# Allegro board BD9E151NUX-E2EVK-101_BRD_REV00_2014-08-20.brd
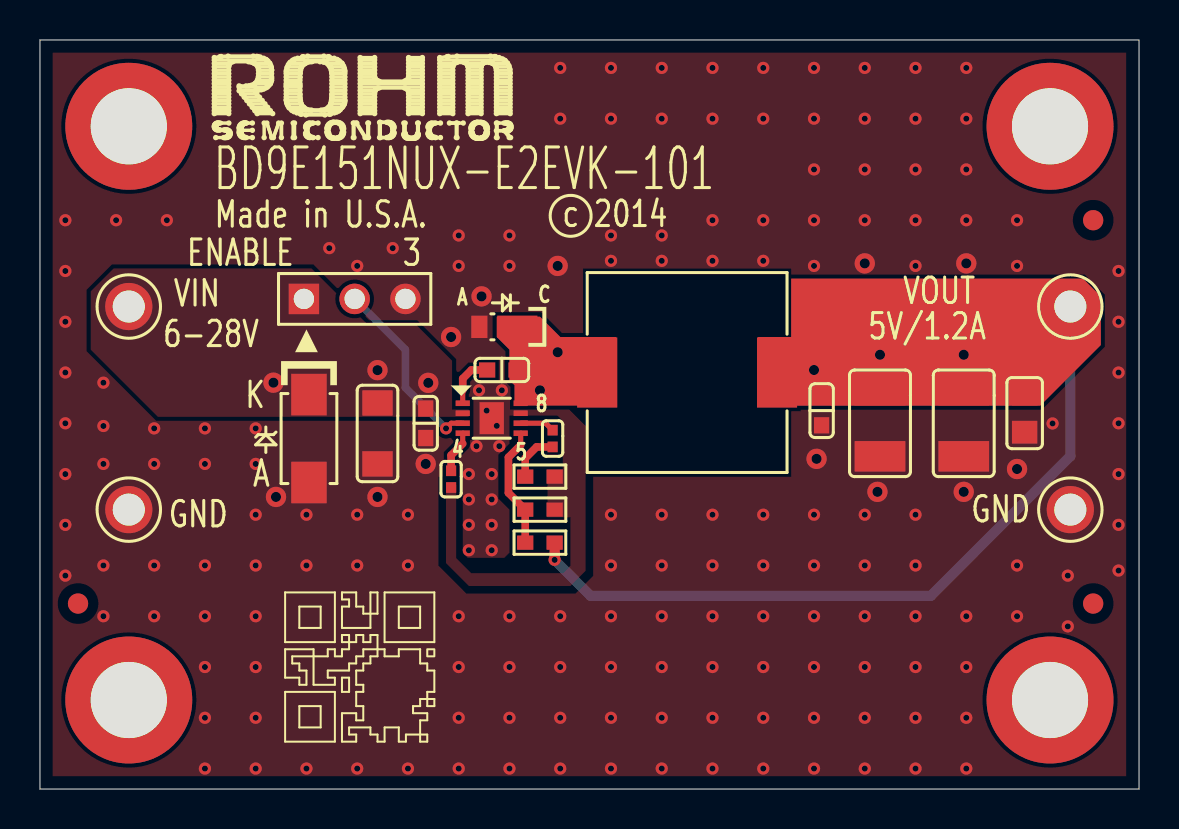
[diagram p0: board, top side]
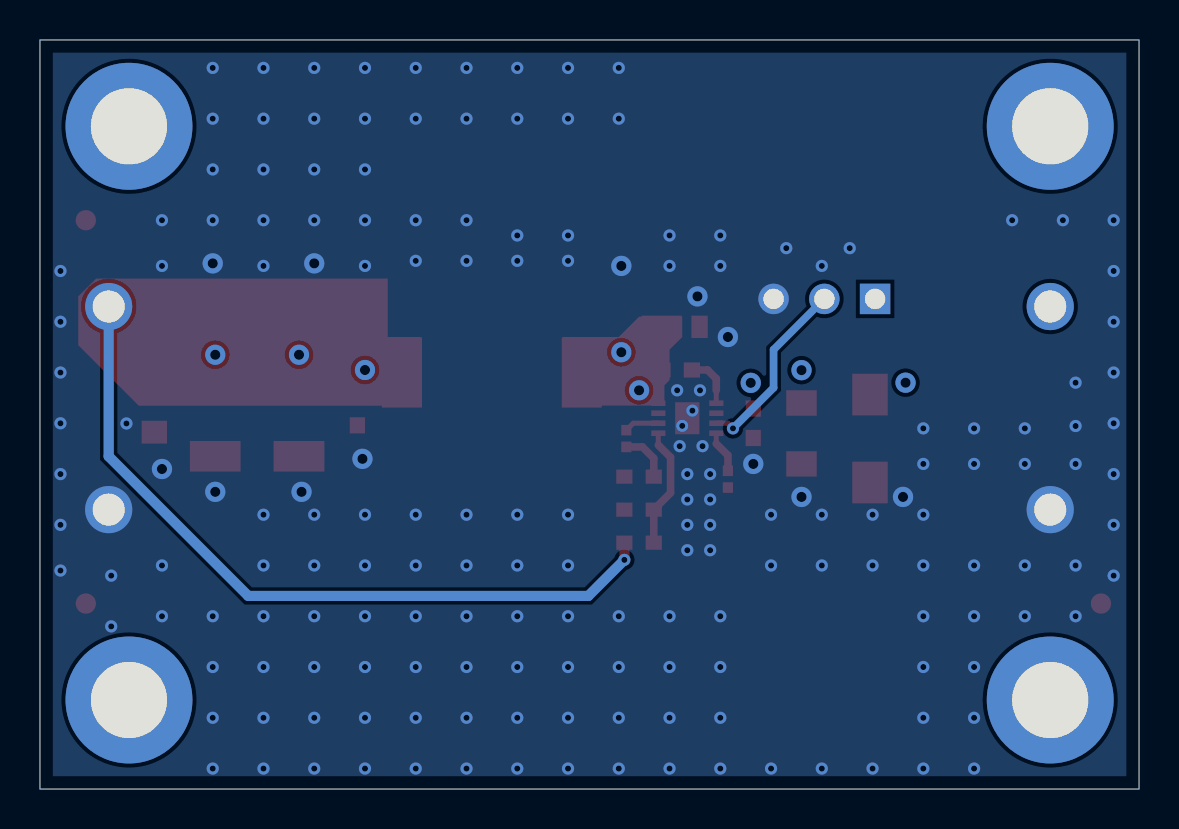
[diagram p1: board, bottom side, seen from below]

Outline 55 x 37.47 mm; copper layers: TOP, BOTTOM. Coordinates in mm from the lower left corner of the outline.
Outline path: 0,37.47 55,37.47 55,0 0,0 0,37.47

## Placement (name value [footprint] x y rotation side)
C1  0.1uF  [C0603]  23.11 20.96 180 top
C2  22uF  [C1210]  46.23 18.3 270 top
C3  22uF  [C1210]  42.04 18.3 270 top
C4  TBD  [C0603]  39.12 18.93 90 top
C5  TBD  [C0805]  49.28 18.8 270 top
C6  10uF  [C1206]  16.89 17.79 270 top
C7  TBD  [C0603]  19.3 18.3 90 top
C8  10000pF  [C0402]  25.65 17.53 270 top
C9  0.047uF  [C0402]  20.57 15.5 270 top
D1  RSX101VA-30TR  [TUMD2]  23.24 23.12 270 top
D2  SMAJ26A  [DO-214AC]  13.46 17.53 270 top
J1  68000-103HLF  [HDR_THVT_1X3_100]  13.21 24.52 0 top
L1  15uH  [SMT_10MX10M]  32.38 20.84 90 top
NOREF  -  [unnamed]  50.55 4.45 0 top
NOREF#2  -  [#2]  0 0 0 top
NOREF#3  -  [unnamed]  50.55 33.15 0 top
NOREF#4  -  [#2]  0 0 0 top
NOREF#5  -  [unnamed#3]  52.7 9.28 0 top
NOREF#6  -  [#2]  55 0 0 top
NOREF#7  -  [#2]  55 0 90 top
NOREF#8  -  [#2]  -18.29 -37.33 0 top
NOREF#9  -  [unnamed]  4.45 33.15 0 top
NOREF#10  -  [#2]  -63.5 -124.58 0 top
NOREF#11  -  [#2]  0 37.47 0 top
NOREF#12  -  [unnamed]  4.45 4.45 0 top
NOREF#13  -  [unnamed#3]  52.7 28.46 0 top
NOREF#14  -  [#2]  0 37.47 0 top
NOREF#15  -  [unnamed#3]  1.91 9.28 0 top
R1  12K  [R0603]  25.02 12.33 0 top
R2  3K  [R0603]  25.02 13.98 180 top
R3  2.7K  [R0603]  25.02 15.63 180 top
TP1  TP_TH_63MIL_RED  [TP_TH]  4.45 24.14 0 top
TP2  TP_TH_63MIL_BLK  [TP_TH]  4.45 13.98 0 top
TP3  TP_TH_63MIL_RED  [TP_TH]  51.56 24.14 0 top
TP4  TP_TH_63MIL_BLK  [TP_TH]  51.56 13.98 0 top
U1  BD9E151NUX  [VSON008X2030]  22.61 18.55 270 top

## Library data of the parts
C1 = CAP_HOZ
C2-C9 = CAP_VER
D1 D2 = DIODE SCHOTTKY_VER
J1 = CONN PCB 3x1_2.100"
L1 = IND_HOZ
R1-R3 = R_VER
TP1 TP3 = TP_TH_63MIL_RED
TP2 TP4 = TP_TH_63MIL_BLK
U1 = IC_BD9E151NUX

## Footprints (pads in the part's own frame, mm; a bottom-side part is the same pattern mirrored in y, then rotated)
C0402
  rect 0.533x0.508 smd: 1(-0.419,0) 2(0.419,0)
C0603
  rect 0.813x0.762 smd: 1(0.737,0) 2(-0.737,0)
C0805
  rect 1.143x1.27 smd: 1(-0.953,0) 2(0.953,0)
C1206
  rect 1.27x1.524 smd: 1(-1.524,0) 2(1.524,0)
C1210
  rect 1.524x2.54 smd: 1(-1.651,0) 2(1.651,0)
DO-214AC
  rect 2.083x1.778 smd: 1(-2.2,0) 2(2.2,0)
HDR_THVT_1X3_100
  rect 1.524x1.524 hole 1.016: 1(0,0)
  round 1.524 hole 1.016: 2(2.54,0) 3(5.08,0)
R0603
  rect 0.813x0.711 smd: 1(0.737,0) 2(-0.737,0)
SMT_10MX10M
  rect 3.505x2.007 smd: 1(0,4.5) 2(0,-4.5)
TP_TH
  round 2.362 hole 1.6: 1(0,0)
TUMD2
  rect 1.118x2.007 smd: 1(0,0.65)
  rect 1.118x0.813 smd: 2(0,-1.25)
unnamed
  round 6.35 hole 3.81: (0,0)
unnamed#3
  round 1.016 smd: 1(0,0)
VSON008X2030
  rect 0.279x0.711 smd: 1(-0.75,-1.45) 2(-0.25,-1.45) 3(0.25,-1.45) 4(0.75,-1.45) 5(0.75,1.45) 6(0.25,1.45) 7(-0.25,1.45) 8(-0.75,1.45)
  rect 1.6x1.219 smd: 9(0,0)

## Nets
GND: C2.2 C3.2 C4.2 C5.2 C6.2 C7.2 C9.2 D1.2(A) D2.2(A) J1.3 R2.2 R3.2 TP2.1 TP4.1 U1.7(GND) U1.9(EPAD)
VIN: C6.1 C7.1 D2.1(C) J1.1 TP1.1 U1.2(VIN)
BST: C1.1 U1.1(BST)
EN: J1.2 U1.3(EN)
FB: R1.2 R2.1 U1.5(FB)
SS: C9.1 U1.4(SS)
SW: C1.2 D1.1(C) L1.1 U1.8(LX)
VC: C8.1 U1.6(VC)
VC_R: C8.2 R3.1
VOUT: C2.1 C3.1 C4.1 C5.1 L1.2 R1.1 TP3.1

Pads without a net: NOREF#5 1; NOREF#13 1; NOREF#15 1

## Via types
v1: diameter 1.016, hole 0.508, TOP to BOTTOM, 20 vias
v2: diameter 0.61, hole 0.305, TOP to BOTTOM, 174 vias

## Routing (per net, layer and track width the routed paths; a pad name or vN(x,y) marks a point on that pad's centre or on a via; arc(x,y) is an arc through that point)
GND:
  vias: v1(11.81,14.61) v1(16.89,14.61) v1(19.3,16.26) v1(20.57,22.61) v1(22.1,24.65) v1(25.91,26.17) v1(38.86,16.52) v1(41.27,26.3) v1(41.91,14.87) v1(46.23,14.87) v1(46.35,26.3) v1(48.9,16.01) v2(1.27,28.46) v2(1.27,25.92) v2(1.27,23.38) v2(1.27,20.84) v2(1.27,18.3) v2(1.27,15.76) v2(1.27,13.22) v2(1.27,10.68) v2(3.17,20.33) v2(3.17,18.16) v2(3.17,16.26) v2(3.17,11.18) v2(3.17,8.64) v2(3.81,28.46) v2(5.71,18.04) v2(5.71,16.26) v2(5.71,11.18) v2(5.71,8.64) v2(6.35,28.46) v2(8.26,18.04) v2(8.26,16.26) v2(8.26,11.18) v2(8.26,8.64) v2(8.26,6.1) v2(8.26,3.56) v2(8.26,1.02) v2(10.79,18.04) v2(10.79,16.26) v2(10.79,13.72) v2(10.79,11.18) v2(10.79,8.64) v2(10.79,6.1) v2(10.79,3.56) v2(10.79,1.02) v2(13.34,13.72) v2(13.34,11.18) v2(13.34,1.02) v2(14.48,27.06) v2(15.88,26.17) v2(15.88,13.72) v2(15.88,11.18) v2(15.88,1.02) v2(17.65,27.06) v2(18.41,13.72) v2(18.41,11.18) v2(18.41,1.02) v2(20.95,27.69) v2(20.95,26.17) v2(20.95,8.64) v2(20.95,6.1) v2(20.95,3.56) v2(20.95,1.02) v2(21.46,15.76) v2(21.46,14.49) v2(21.46,13.22) v2(21.46,11.95) v2(21.84,17.15) v2(21.97,19.95) v2(22.35,18.93) v2(22.61,15.76) v2(22.61,14.49) v2(22.61,13.22) v2(22.61,11.95) v2(22.86,18.17) v2(22.99,17.15) v2(23.11,19.95) v2(23.5,27.69) v2(23.5,26.17) v2(23.5,8.64) v2(23.5,6.1) v2(23.5,3.56) v2(23.5,1.02) v2(26.04,36.08) v2(26.04,33.54) v2(26.04,8.64) v2(26.04,6.1) v2(26.04,3.56) v2(26.04,1.02) v2(28.57,36.08) v2(28.57,33.54) v2(28.57,27.69) v2(28.57,26.42) v2(28.57,13.72) v2(28.57,11.18) v2(28.57,8.64) v2(28.57,6.1) v2(28.57,3.56) v2(28.57,1.02) v2(31.11,36.08) v2(31.11,33.54) v2(31.11,27.69) v2(31.11,26.42) v2(31.11,13.72) v2(31.11,11.18) v2(31.11,8.64) v2(31.11,6.1) v2(31.11,3.56) v2(31.11,1.02) v2(33.66,36.08) v2(33.66,33.54) v2(33.66,28.46) v2(33.66,26.42) v2(33.66,13.72) v2(33.66,11.18) v2(33.66,8.64) v2(33.66,6.1) v2(33.66,3.56) v2(33.66,1.02) v2(36.2,36.08) v2(36.2,33.54) v2(36.2,28.46) v2(36.2,26.42) v2(36.2,13.72) v2(36.2,11.18) v2(36.2,8.64) v2(36.2,6.1) v2(36.2,3.56) v2(36.2,1.02) v2(38.73,36.08) v2(38.73,33.54) v2(38.73,31) v2(38.73,28.46) v2(38.73,26.17) v2(38.73,13.72) v2(38.73,11.18) v2(38.73,8.64) v2(38.73,6.1) v2(38.73,3.56) v2(38.73,1.02) v2(41.27,36.08) v2(41.27,33.54) v2(41.27,31) v2(41.27,28.46) v2(41.27,13.72) v2(41.27,11.18) v2(41.27,8.64) v2(41.27,6.1) v2(41.27,3.56) v2(41.27,1.02) v2(43.81,36.08) v2(43.81,33.54) v2(43.81,31) v2(43.81,28.46) v2(43.81,26.17) v2(43.81,13.72) v2(43.81,11.18) v2(43.81,8.64) v2(43.81,6.1) v2(43.81,3.56) v2(43.81,1.02) v2(46.35,36.08) v2(46.35,33.54) v2(46.35,31) v2(46.35,28.46) v2(46.35,8.64) v2(46.35,6.1) v2(46.35,3.56) v2(46.35,1.02) v2(48.9,28.46) v2(48.9,26.17) v2(48.9,11.18) v2(48.9,8.64) v2(50.67,18.29) v2(51.44,10.68) v2(51.44,8.14) v2(53.98,25.92) v2(53.98,23.38) v2(53.98,20.84) v2(53.98,18.3) v2(53.98,15.76) v2(53.98,13.22) v2(53.98,10.93)
VIN:
  vias: v1(11.68,20.33) v1(16.89,20.95) v1(19.43,20.32)
BST: length 2.6
  TOP w0.254: U1.1 21.16,19.95
  TOP w0.381: 21.16,19.95 21.16,20.53 21.59,20.96 C1.1
EN: length 9.3
  TOP w0.254: U1.3 20.58,18.3 v2(20.32,18.04)
  BOTTOM w0.381: v2(20.32,18.04) 18.29,20.07 18.29,21.98 J1.2
FB: length 6.1
  TOP w0.254: 24.06,17.21 U1.5
  TOP w0.381: 24.06,17.21 23.44,16.59 23.44,14.82 R2.1 R1.2
SS: length 2.1
  TOP w0.254: U1.4 21.16,17.28
  TOP w0.381: 21.16,17.28 20.57,16.7 C9.1
SW:
  vias: v1(25.02,19.95) v1(25.91,21.85)
VC: length 1.7
  TOP w0.254: U1.6 25.31,18.3 C8.1
VC_R: length 2.5
  TOP w0.381: R3.1 24.28,16.54 24.85,17.11 C8.2
VOUT: length 37.8
  TOP w0.508: R1.1 v2(25.76,11.46)
  BOTTOM w0.508: v2(25.76,11.46) 27.56,9.66 44.58,9.66 51.56,16.64 TP3.1
  vias: v1(38.73,20.96) v1(42.04,21.72) v1(46.23,21.72)

## Copper pours and planes (outline as drawn; the poured copper is in the pictures)
GND on TOP: 0.64,0.64 0.64,36.84 54.36,36.84 54.36,0.64 ; 1 cut-out
GND on BOTTOM: 0.64,36.84 0.64,0.64 54.36,0.64 54.36,36.84
VIN on TOP: 21.46,18.63 5.89,18.63 2.54,21.98 2.54,24.9 3.68,26.04 13.59,26.04 16.38,23.25 18.8,23.25 20.62,21.42 20.62,18.98 21.46,18.98
SW on TOP (solid shape): 26.04,22.61 28.83,22.61 28.83,19.18 23.75,19.18 23.75,20.2 23.5,20.45 23.5,21.98 22.86,22.61 22.86,23.63 25.02,23.63
VOUT on TOP (solid shape): 53.09,24.65 53.09,22.21 50.06,19.18 35.94,19.18 35.94,22.61 37.59,22.61 37.59,25.53 52.2,25.53

## Text on the board
Ref Des/Silkscreen Top: 6-28V | GND | VIN | ENABLE | Made in U.S.A. | c 2014 | 5V/1.2A | VOUT | BD9E151NUX-E2EVK-101
User.17: 14. Rounding is allowed on 90 degree corners with the size of | 12. Inside corners should be rounded-off | 13. Changes to board geometries and apertures are not | 10. Bow and Twist | 11. Inspection | standard routing bit. | allowed unless they are approved by customer. | 4. Drilling | 5. Finish | 9. Packaging | 8. Cleanliness | 7. Electrical Test | 3. Soldermask | photoimageable soldermask, 003 max. thickness. | Soldermask over bare copper. | Soldermask is allowed in via holes. | Bow and twist to be .007 IN/IN or .090 max according to IPC-A-600D. | NOTES: | 2. Material | 6. Silkscreen | to conduct a thorough review of the artwork and media for | writing (in advance of manufacturing) of any changes, revisions,or | 1. Specifications. | as meaxured by the omega meter 600SMD. | A. All hole diameters are finished sizes. | B. All hole to be +/- .003 from true position unless otherwise specified. | C. All hole diameters to be +/- .003 unless otherwise specified. | D. An NC drill file has been supplied - see drill table. | A. Plate thru with copper .0010 min to .002 max. thickness drill size | dimension apply after plating. | B. Use gold immersion over nickel. | C. Finished boards shall not have nicks, | scratches, voids, exposed copper, poor plating, all misdrilled holes. | manufacturability in the supplier's process compliance to all | A. Boards shall be free of fiber glass dust or any other foreign material. | B. Finished boards must conform to 0.01 MG/IN max NAcL ionic contamination | A. All boards shall be 100% electrically tested for opens/short at 10 volts. | MIL-SPEC boards to be tested at 40 volts. | B. Apply test stamp in non-legend area on solder side of PCB. | C. Test is required on both sides of the board. | Solder mask both sides with (green color) liquid | A. FR406. | B. Color to be opaque. | A. Silkscreen using white non-conductive epoxy or equivalent (both sides). | B. No silkscreen allowed on exposed lands. | C. Silkscreen must be a minimum of 3mm away form fiducial marks. | D. Minimum clearance between silkscreen legend and vias, pads, or holes | to be .005. | E. Silkscreen is allowed in via holes. | There shall be a max of 25 units per package, individually wrapped, | and shipped in cardboard cratons with sufficient surrounding | material to prevend shipping damage. | A.Automatic optical inspection of all layers required. | B.The impedance should be controlled by stackup layer. | gerber and drill data when applicable. | A. Fabricate IAW  IPC600, latest revision. | B. Producibility study - It is the respondsibility  of the supplier | corrections made or recommendations to ensure conformance to | D. This drawing is to be used in conjunction with the provided | E. All notes are "Unless Otherwise Specified." | standards, and of  any specifications that  cannot be met. | applicable specifications. Customer must be advised in
User.27: L2_GND
User.28: L3_PWR
User.29: 1 | 2 | L | TOTAL 62 MILs +/-10% thickness board | a | - | y | e | r | s | T | ( | . | m | h | C | 4 | i | 0 | c | u | l | k | ) | D | P | w | 2 oz | t | H | F | o | z | p | V
User.32: FIGURE | SIZE | 12.0 | 20.0 | 40.0 | 63.0 | 150.0 | DRILL CHART: TOP to BOTTOM | ALL UNITS ARE IN MILS | TOLERANCE | +3.0/-10.0 | +3.0/-3.0 | PLATED | QTY | 174 | 20 | 3 | 4
